# Altium PCB ARDUINO-DUE-NO-SPI_2021-11-28.pcbdoc
Units mil, origin at the board's own origin, x right, y up, seen from the top; angles counter-clockwise.
Board outline 5100 x 3120 mil, 2 copper layers (Top Layer, Bottom Layer); 1 components, 0 nets, 86 pads, 0 vias.
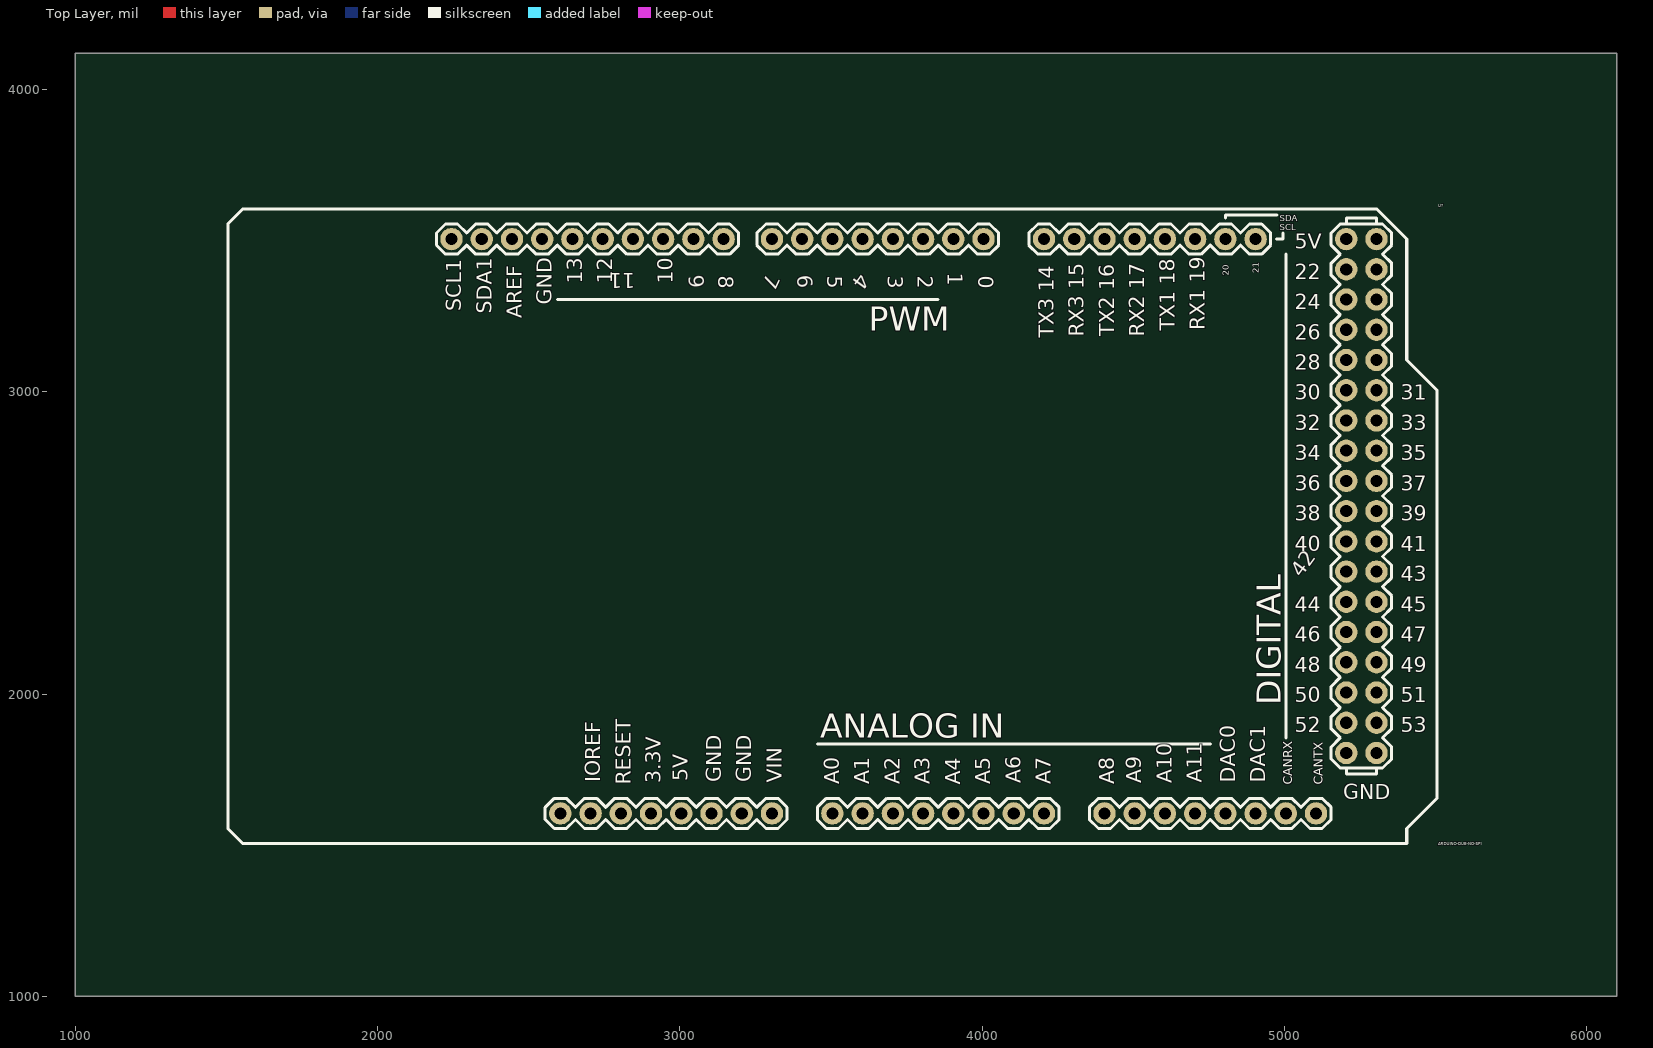
[diagram p0: Top Layer view]
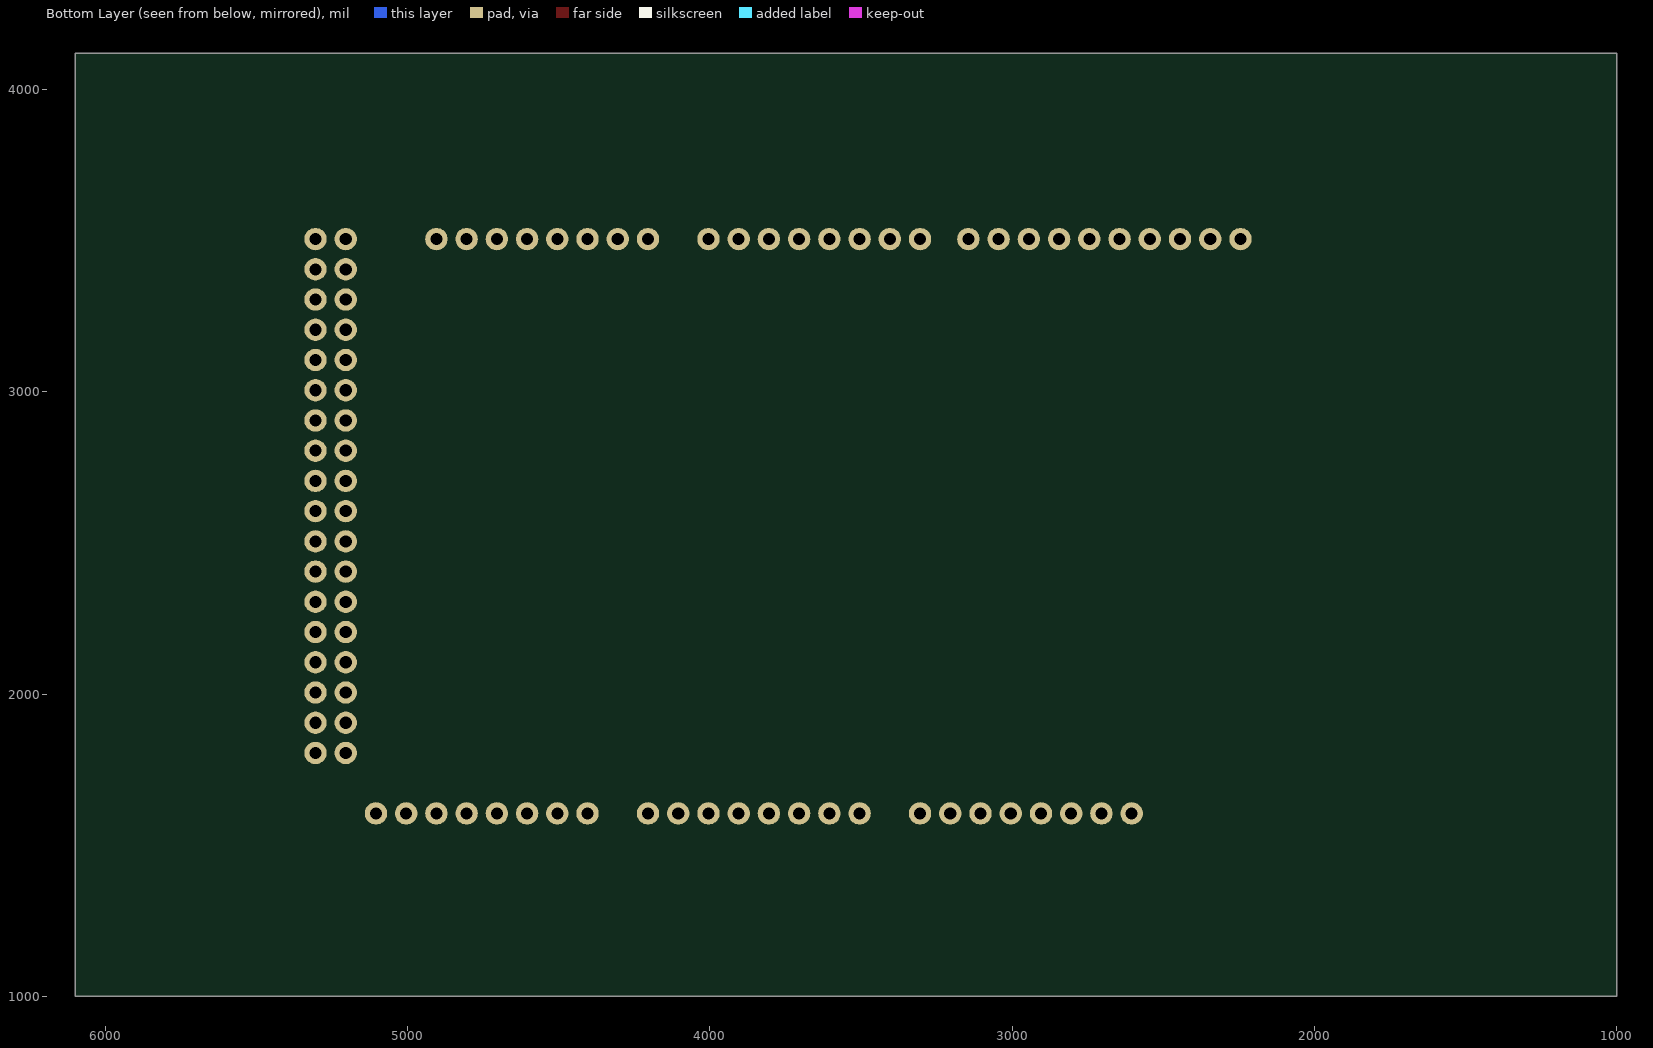
[diagram p1: Bottom Layer view, seen from below]

## Layer stack, top to bottom
Top Solder: solder mask 0.4, Solder Resist, Dk 3.5
Top Layer: signal copper 1.4
Dielectric1: dielectric 12.6, FR-4, Dk 4.8
Bottom Layer: signal copper 1.4
Bottom Solder: solder mask 0.4, Solder Resist, Dk 3.5

## Board outline
6100,1000 1000,1000 1000,4120 6100,4120

## Design rules (kind name [scope] priority, off if disabled: settings)
Clearance [All] p1: gap=10 ignorepadtopadclearanceinfootprint=FALSE except(0: Arc-Hole Track-Hole SMDPad-Hole THPad-Hole Via-Hole Fill-Hole Poly-Hole Region-Hole Text-Hole)
PolygonConnect [All] p1: connectstyle=Relief reliefconductorwidth=10 reliefentries=4 polygonreliefangle="90 Angle" airgapwidth=10
RoutingVias [All] p1: holewidth=28 width=50 viastyle="Through Hole" minholewidth=28 minwidth=50 maxholewidth=28 maxwidth=50
SolderMaskExpansion [All] p1: expansion=4 istentingtop=FALSE
Width [All] p1: maxlimit=10 minlimit=10 preferedwidth=10
30 further rules are at their usual default settings.

## Components (designator, comment, footprint, x,y, rotation, side; value= is the part's Value field where it differs from the comment)
U? "ARDUINO-DUE-NO-SPI" ARDUINO-DUE-NO-SPI 3505,2555 r0 top

## Footprints (in the part's own frame and the unit in brackets; to place one, negate y for a bottom-side part, rotate by r counter-clockwise, add the part's x,y. Pads: shape width x height; smd on the part's side, far side on the other; paste and mask are expansions set on the pad)
ARDUINO-DUE-NO-SPI [mil]
  round 74 hole 40: 3.3V(-600,-950) 5V@0(1700,950) 5V@1(1800,950) 5V@2(-500,-950) A0(0,-950) A1(100,-950) A2(200,-950) A3(300,-950) A4(400,-950) A5(500,-950) A6(600,-950) A7(700,-950) A8(900,-950) A9(1000,-950) A10(1100,-950) A11(1200,-950) AREF(-1060,950) CANRX(1500,-950) CANTX(1600,-950) D0(500,950) D1(400,950) D2(300,950) D3(200,950) D4(100,950) D5(0,950) D6(-100,950) D7(-200,950) D8(-360,950) D9(-460,950) D10(-560,950) D11(-660,950) D12(-760,950) D13(-860,950) D14(700,950) D15(800,950) D16(900,950) D17(1000,950) D18(1100,950) D19(1200,950) D20(1300,950) D21(1400,950) D22(1700,850) D23(1800,850) D24(1700,750) D25(1800,750) D26(1700,650) D27(1800,650) D28(1700,550) D29(1800,550) D30(1700,450) D31(1800,450) D32(1700,350) D33(1800,350) D34(1700,250) D35(1800,250) D36(1700,150) D37(1800,150) D38(1700,50) D39(1800,50) D40(1700,-50) D41(1800,-50) D42(1700,-150) D43(1800,-150) D44(1700,-250) D45(1800,-250) D46(1700,-350) D47(1800,-350) D48(1700,-450) D49(1800,-450) D50(1700,-550) D51(1800,-550) D52(1700,-650) D53(1800,-650) DAC0(1300,-950) DAC1(1400,-950) GND@0(-960,950) GND@1(1700,-750) GND@2(1800,-750) GND@3(-300,-950) GND@4(-400,-950) IOREF(-800,-950) NC(-900,-950) RESET(-700,-950) SCL1(-1260,950) SDA1(-1160,950) VIN(-200,-950)
  silkscreen extent -2000,-1050 2000,1050

## Nets (pads, with @x,y where several pads share a name; then routed paths per layer and width w, separated by ;. In a path a pad name is that pad's centre, name@x,y a point inside that pad or via, vN(x,y) a via of type N, cw(c..) or ccw(c..) an arc to the next point about the centre after c; other vN are vias at no path point)
pads on no net: U?.3.3V U?.5V@0 U?.5V@1 U?.5V@2 U?.A0 U?.A1 U?.A2 U?.A3 U?.A4 U?.A5 U?.A6 U?.A7 U?.A8 U?.A9 U?.A10 U?.A11 U?.AREF U?.CANRX U?.CANTX U?.D0 U?.D1 U?.D2 U?.D3 U?.D4 U?.D5 U?.D6 U?.D7 U?.D8 U?.D9 U?.D10 U?.D11 U?.D12 U?.D13 U?.D14 U?.D15 U?.D16 U?.D17 U?.D18 U?.D19 U?.D20 U?.D21 U?.D22 U?.D23 U?.D24 U?.D25 U?.D26 U?.D27 U?.D28 U?.D29 U?.D30 U?.D31 U?.D32 U?.D33 U?.D34 U?.D35 U?.D36 U?.D37 U?.D38 U?.D39 U?.D40 U?.D41 U?.D42 U?.D43 U?.D44 U?.D45 U?.D46 U?.D47 U?.D48 U?.D49 U?.D50 U?.D51 U?.D52 U?.D53 U?.DAC0 U?.DAC1 U?.GND@0 U?.GND@1 U?.GND@2 U?.GND@3 U?.GND@4 U?.IOREF U?.NC U?.RESET U?.SCL1 U?.SDA1 U?.VIN

## Silkscreen, mask and mechanical layers (free items; w line width, h text height)
Document:
  lines w0.1: 3549,2559 3551,2561

## Text inside footprints (layer, text, board x,y; h text height)
U?: Top Overlay "31" at 5385,2972.7 h50; Top Overlay "33" at 5385,2872.7 h50; Top Overlay "35" at 5385,2772.7 h50; Top Overlay "37" at 5385,2672.7 h50; Top Overlay "39" at 5385,2572.7 h50; Top Overlay "41" at 5385,2472.7 h50; Top Overlay "43" at 5385,2372.7 h50; Top Overlay "45" at 5385,2272.7 h50; Top Overlay "47" at 5385,2172.7 h50; Top Overlay "49" at 5385,2072.7 h50; Top Overlay "51" at 5385,1972.7 h50; Top Overlay "53" at 5385,1872.7 h50; Top Overlay "52" at 5035,1872.7 h50; Top Overlay "50" at 5035,1972.7 h50; Top Overlay "48" at 5035,2072.7 h50; Top Overlay "46" at 5035,2172.7 h50; Top Overlay "44" at 5035,2272.7 h50; Top Overlay "42" at 5055.23,2383.01 h50 r54; Top Overlay "40" at 5035,2472.7 h50; Top Overlay "38" at 5035,2572.7 h50; Top Overlay "36" at 5035,2672.7 h50; Top Overlay "34" at 5035,2772.7 h50; Top Overlay "32" at 5035,2872.7 h50; Top Overlay "30" at 5035,2972.7 h50; Top Overlay "28" at 5035,3072.7 h50; Top Overlay "26" at 5035,3172.7 h50; Top Overlay "24" at 5035,3272.7 h50; Top Overlay "22" at 5035,3372.7 h50; Top Overlay "RX3 15" at 4337.3,3181.4 h50 r90; Top Overlay "TX2 16" at 4437.3,3183.6 h50 r90; Top Overlay "RX2 17" at 4537.3,3181.4 h50 r90; Top Overlay "TX1 18" at 4637.3,3201.8 h50 r90; Top Overlay "RX1 19" at 4737.3,3204.1 h50 r90; Top Overlay "20" at 4815.9,3383.5 h20 r90; Top Overlay "21" at 4915.9,3391.7 h20 r90; Top Overlay "5V" at 5035,3472.7 h50; Top Overlay "GND" at 5195,1652.7 h50; Top Overlay "8" at 3127.3,3383.2 h50 r270; Top Overlay "SCL1" at 2277.3,3265.5 h50 r90; Top Overlay "SDA1" at 2377.3,3258.6 h50 r90; Top Overlay "9" at 3027.4,3383.32 h50 r275; Top Overlay "10" at 2977.3,3356.8 h50 r90; Top Overlay "11" at 2852.3,3392.3 h50 r180; Top Overlay "12" at 2777.3,3356.8 h50 r90; Top Overlay "13" at 2677.3,3356.8 h50 r90; Top Overlay "TX3 14" at 4237.3,3179.1 h50 r90; Top Overlay "7" at 3289.64,3393.77 h50 r245; Top Overlay "6" at 3387.4,3383.32 h50 r275; Top Overlay "5" at 3487.3,3383.2 h50 r270; Top Overlay "4" at 3592.07,3395.59 h50 r234; Top Overlay "3" at 3687.3,3383.2 h50 r270; Top Overlay "2" at 3787.3,3383.2 h50 r270; Top Overlay "1" at 3887.3,3393.6 h50 r270; Top Overlay "0" at 3987.3,3383.2 h50 r270; Top Overlay "A3" at 3827.3,1701.8 h50 r90; Top Overlay "A2" at 3727.3,1701.8 h50 r90; Top Overlay "A1" at 3627.3,1702.3 h50 r90; Top Overlay "A0" at 3527.3,1701.8 h50 r90; Top Overlay "GND" at 2577.3,3287.3 h50 r90; Top Overlay "AREF" at 2477.3,3242.7 h50 r90; Top Overlay "A4" at 3927.3,1699.5 h50 r90; Top Overlay "A5" at 4027.3,1701.8 h50 r90; Top Overlay "A6" at 4127.3,1704.1 h50 r90; Top Overlay "A7" at 4227.3,1701.8 h50 r90; Top Overlay "A8" at 4437.3,1701.8 h50 r90; Top Overlay "A9" at 4527.3,1704.1 h50 r90; Top Overlay "A10" at 4627.3,1705.5 h50 r90; Top Overlay "A11" at 4727.3,1705.9 h50 r90; Top Overlay "DAC0" at 4837.3,1705.9 h50 r90; Top Overlay "DAC1" at 4937.3,1706.4 h50 r90; Top Overlay "CANRX" at 5026.4,1699.5 h30 r90; Top Overlay "CANTX" at 5126.4,1699.5 h30 r90; Top Overlay "IOREF" at 2737.3,1707.7 h50 r90; Top Overlay "RESET" at 2837.3,1700.5 h50 r90; Top Overlay "3.3V" at 2937.3,1705.5 h50 r90; Top Overlay "5V" at 3027.3,1711.8 h50 r90; Top Overlay "GND" at 3137.3,1707.3 h50 r90; Top Overlay "GND" at 3237.3,1707.3 h50 r90; Top Overlay "VIN" at 3337.3,1706.8 h50 r90; Top Overlay "PWM" at 3625,3201.4 h80; Top Overlay "ANALOG IN" at 3465,1855 h80; Top Overlay "SDA" at 4985,3564.1 h20; Top Overlay "SCL" at 4985,3534.1 h20; Top Overlay "DIGITAL" at 4988.6,1962.8 h80 r90